# Altium PCB CAN Breakout.PcbDoc
Units mil, origin at the board's own origin, x right, y up, seen from the top; angles counter-clockwise.
Board outline 2952.76 x 2952.76 mil, 2 copper layers (Top Layer, Bottom Layer); 39 components, 20 nets, 94 pads, 38 vias.
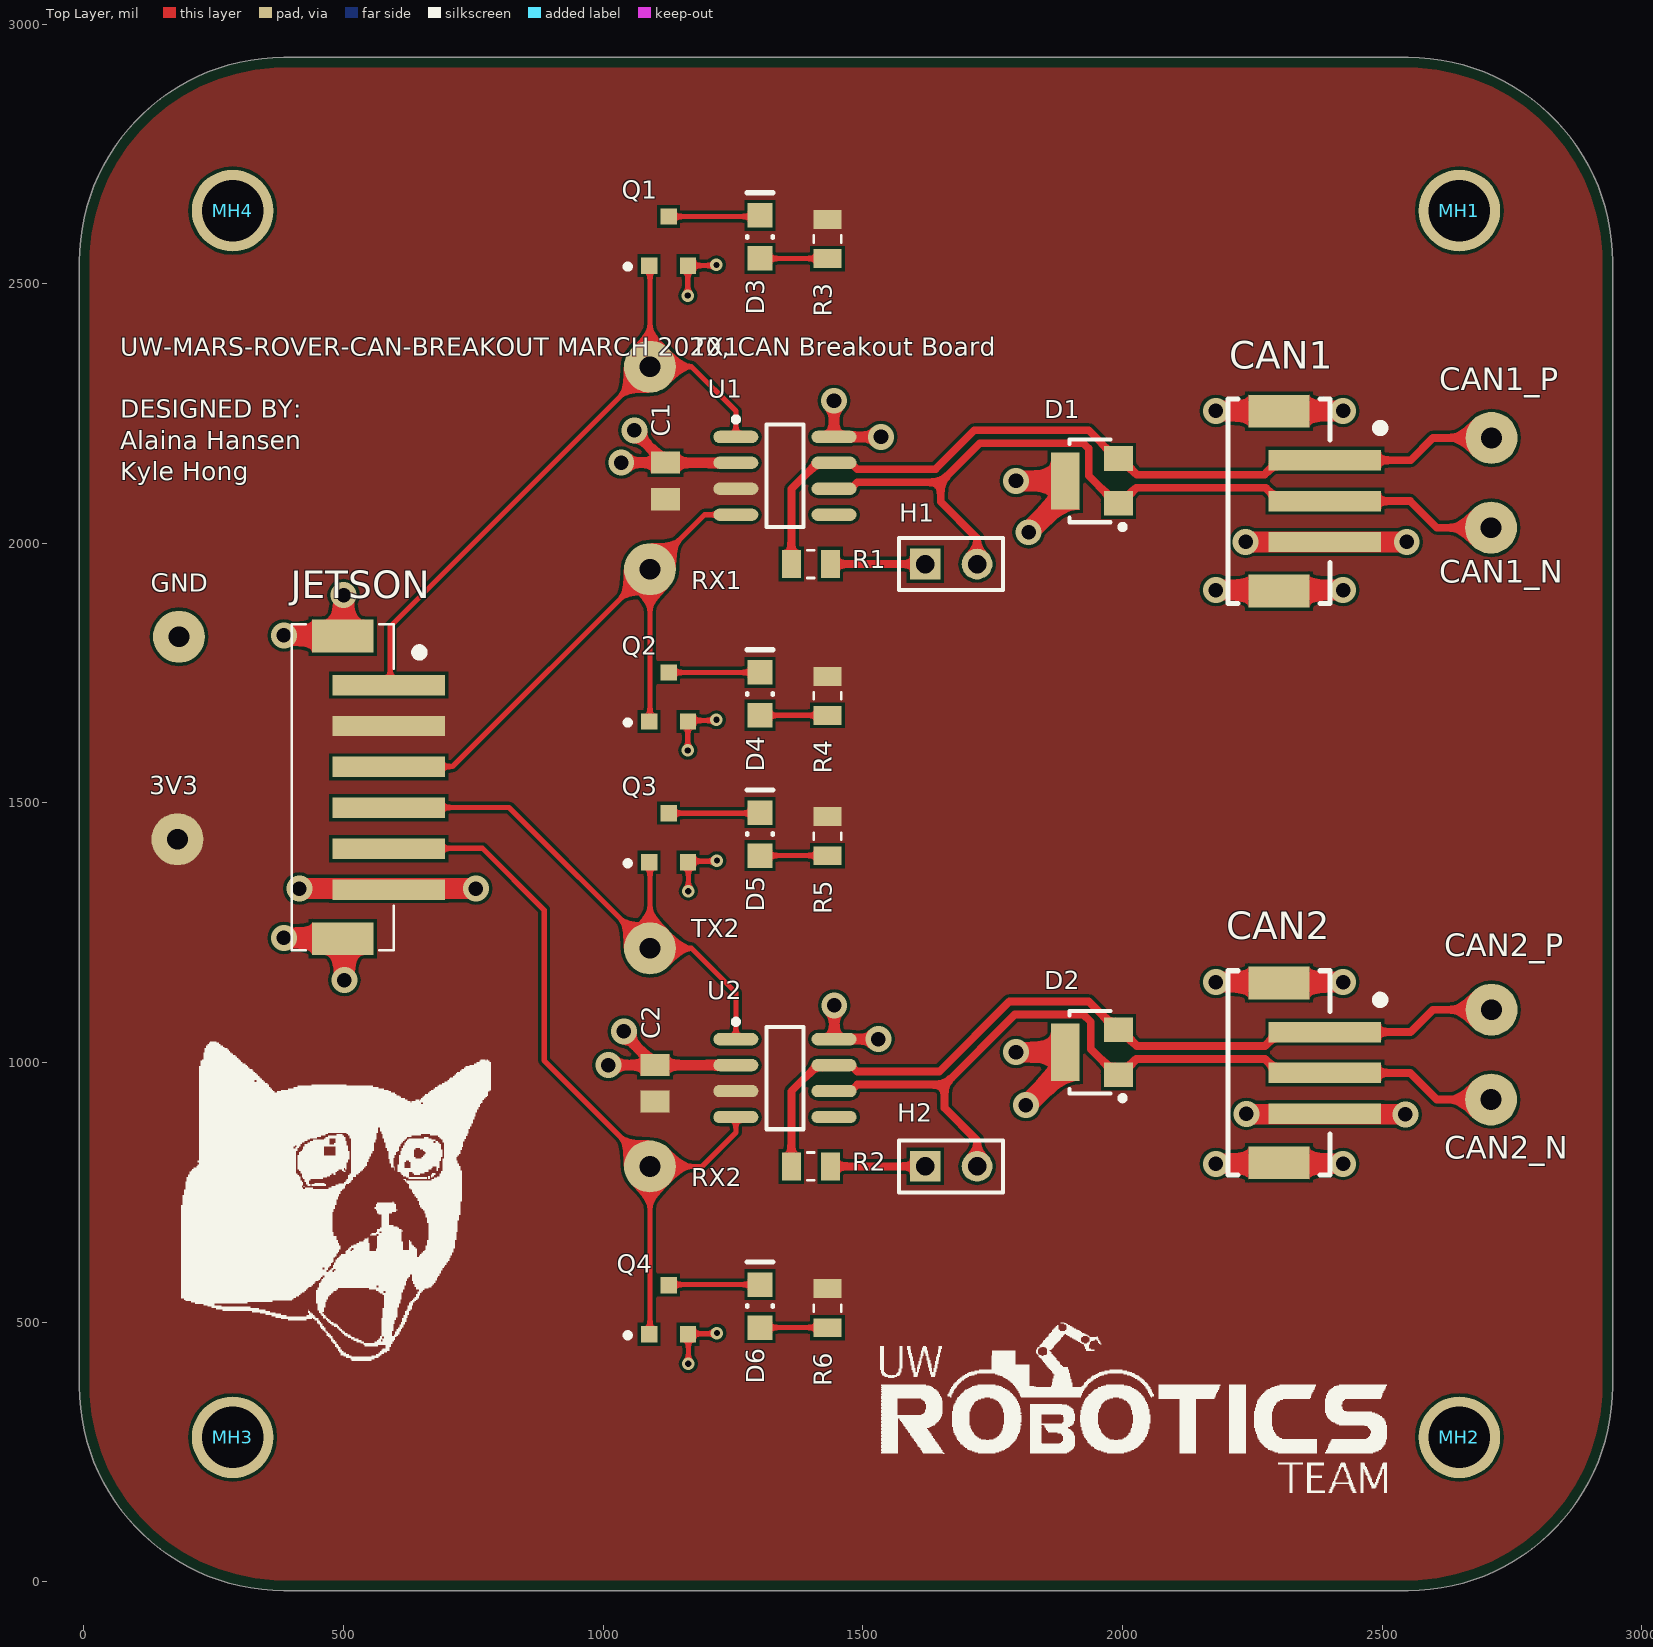
[diagram p0: Top Layer view]
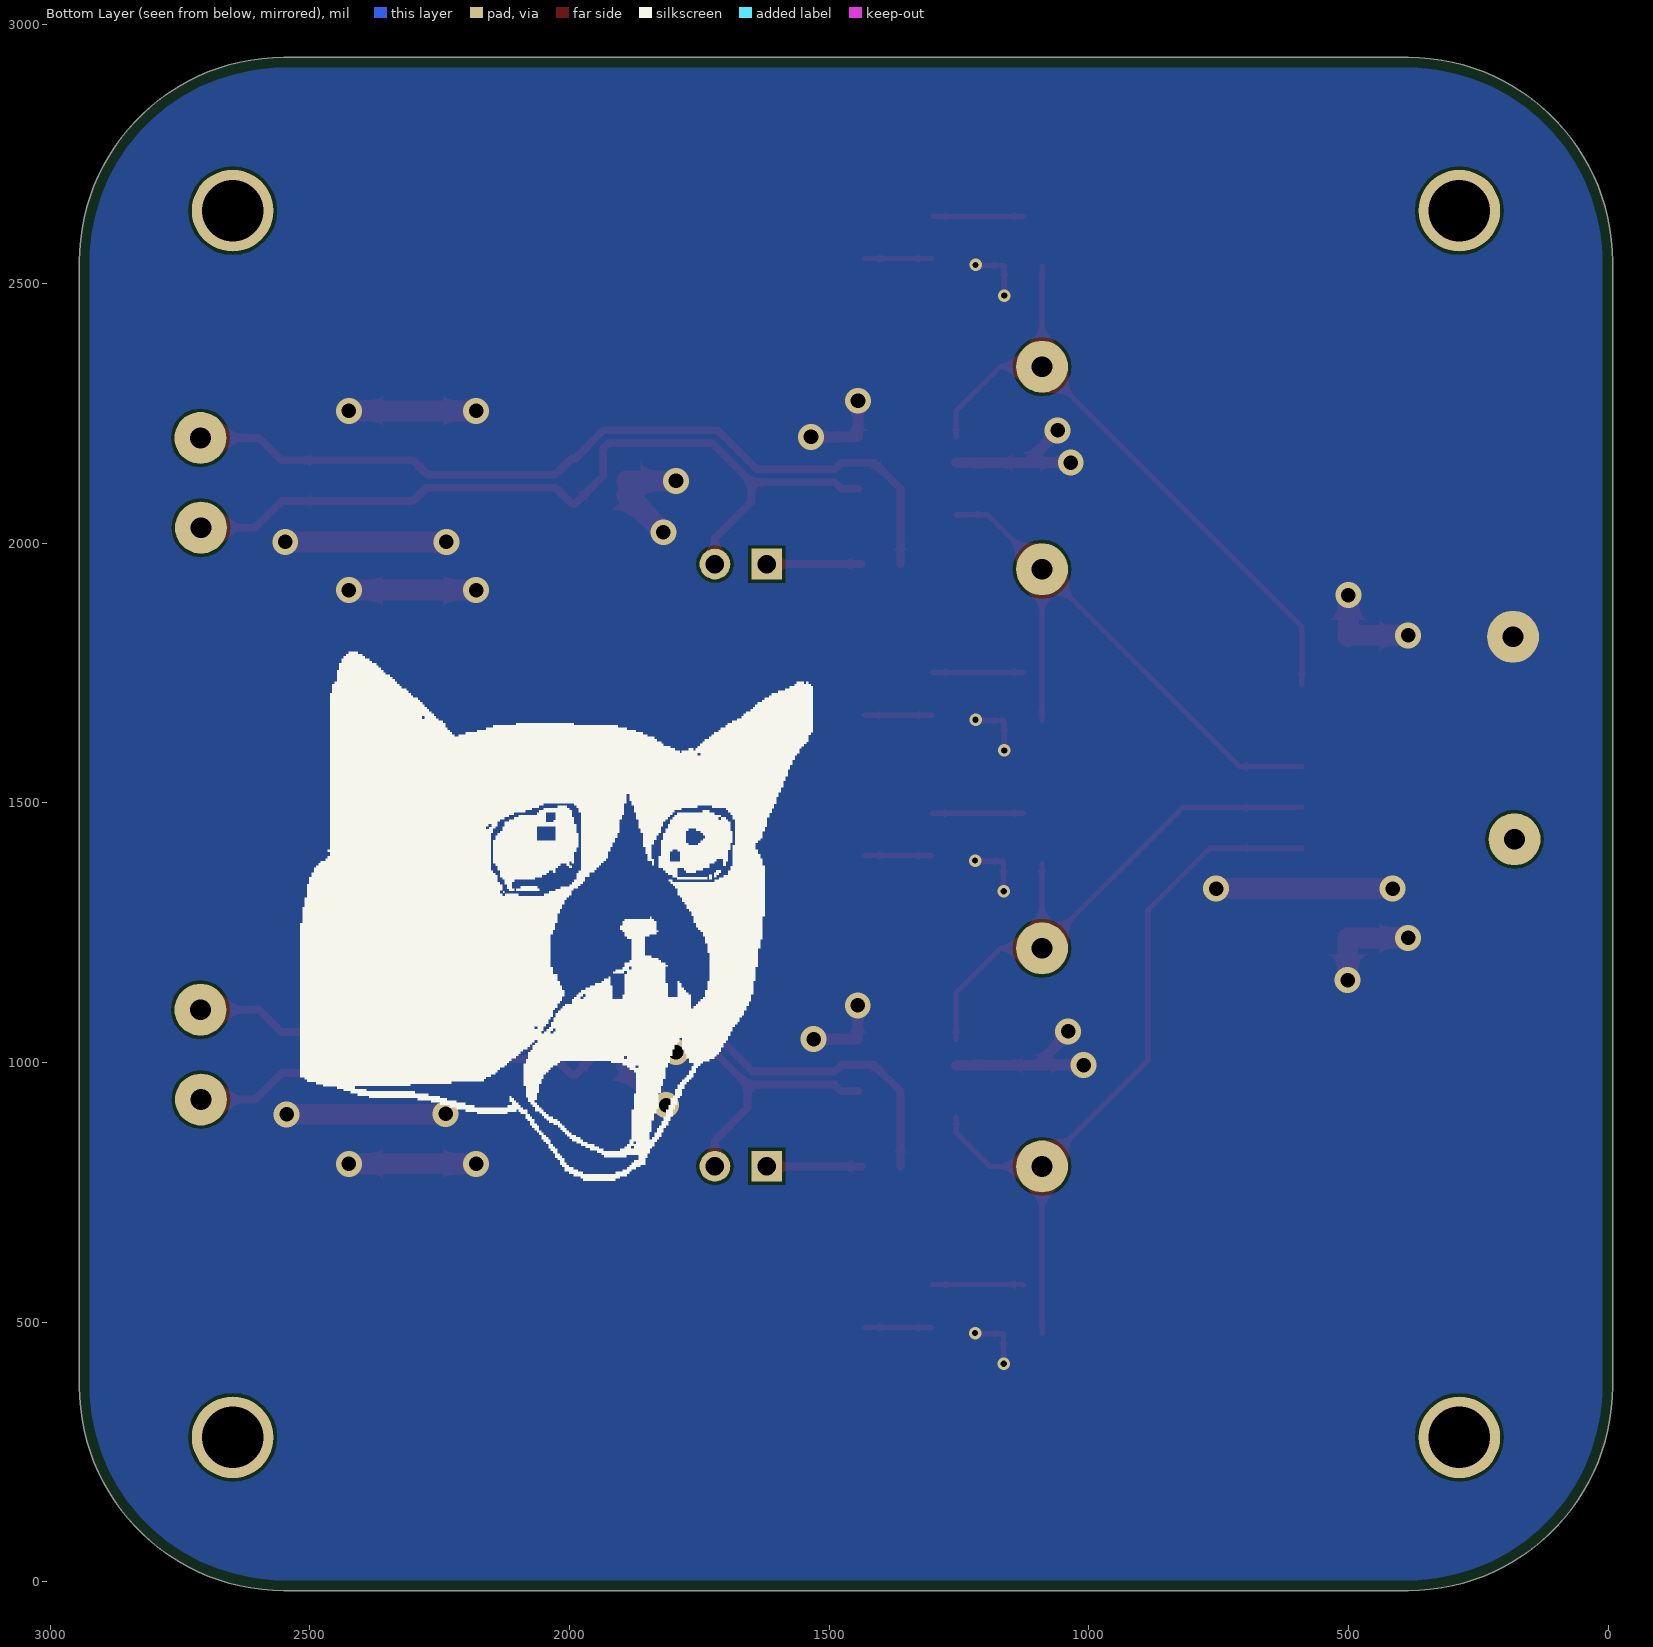
[diagram p1: Bottom Layer view, seen from below]
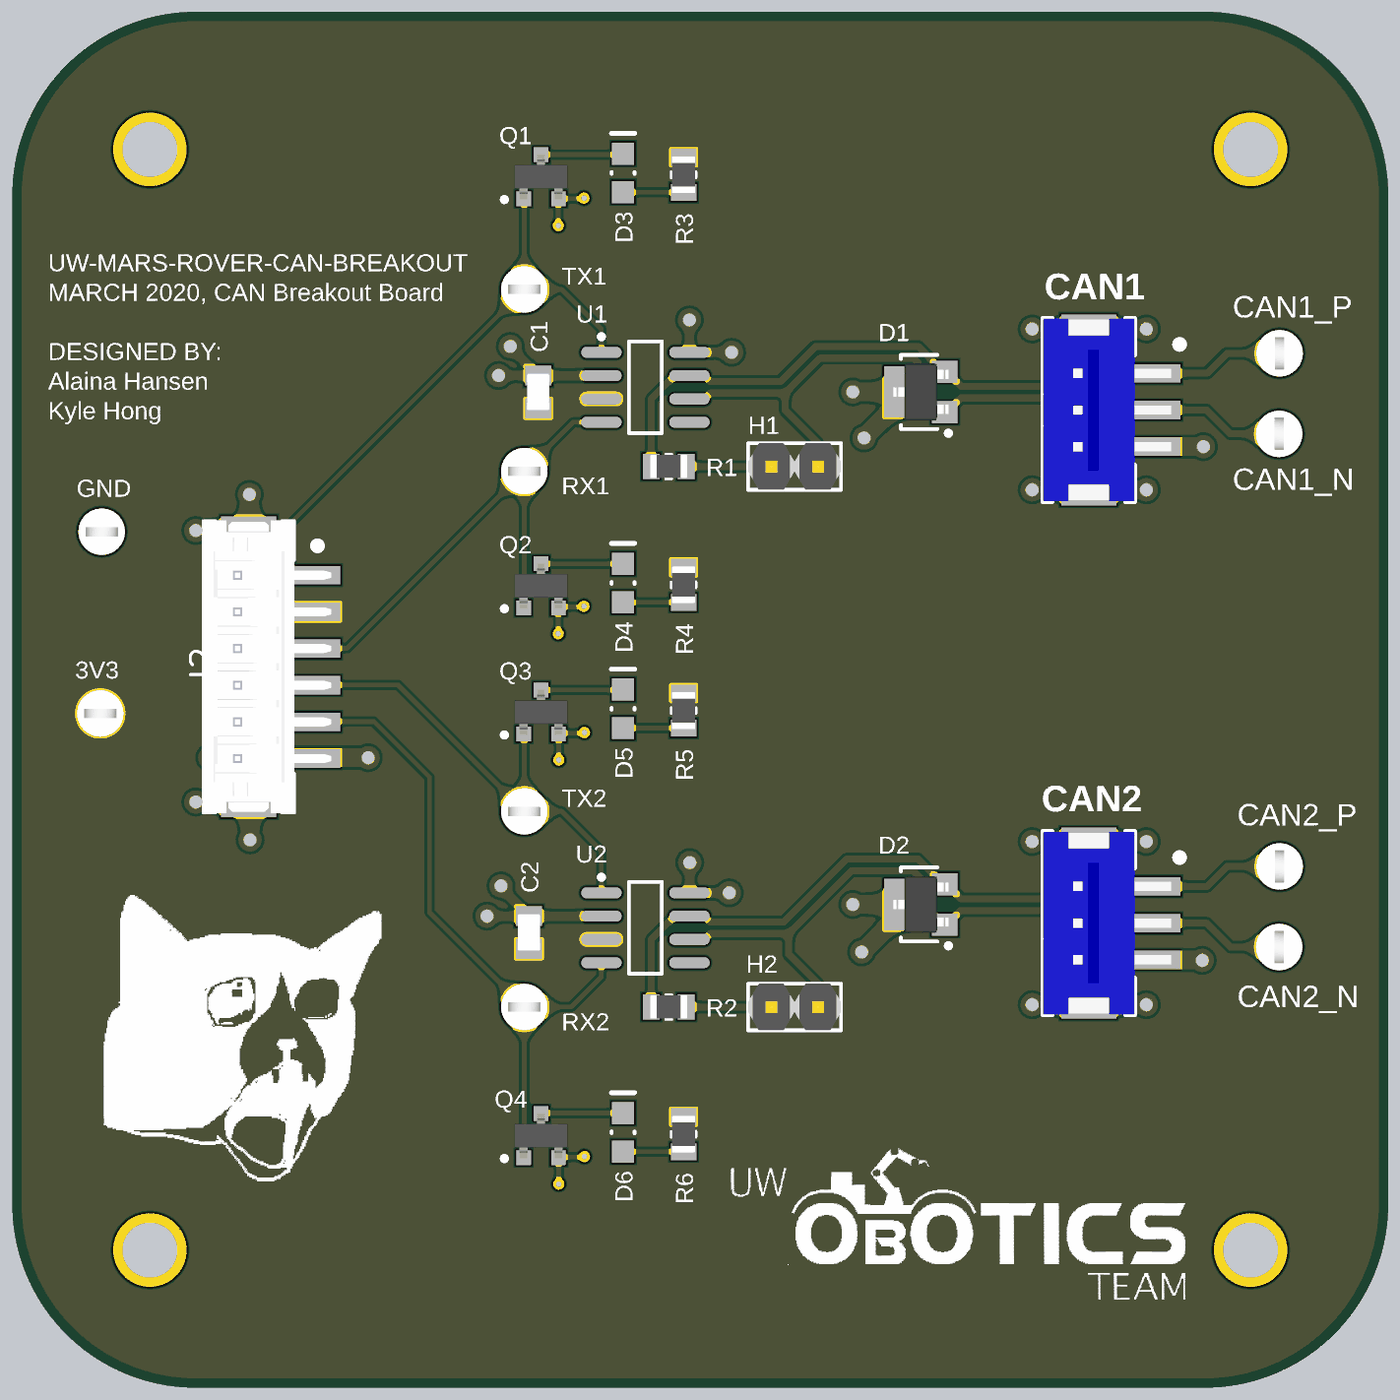
[diagram p2: 3D render of the assembled board from above, using the file's embedded part models]

## Layer stack, top to bottom
Top Solder: solder mask 0.4, Solder Resist, Dk 3.5
Top Layer: signal copper 1.4
Dielectric 1: dielectric 12.6, FR-4, Dk 4.8
Bottom Layer: signal copper 1.4
Bottom Solder: solder mask 0.4, Solder Resist, Dk 3.5

## Board outline
-8.77,376.72 -8.77,2542.07 cw(c384.93,2542.07) 384.93,2935.77 2550.28,2935.77 cw(c2550.28,2542.07) 2943.98,2542.07 2943.98,376.72 cw(c2550.28,376.72) 2550.28,-16.98 384.93,-16.98 cw(c384.93,376.72)

## Design rules (kind name [scope] priority, off if disabled: settings)
BoardOutlineClearance [All] p1: gap=20 ignorepadtopadclearanceinfootprint=FALSE
Clearance [All] p1: gap=6 ignorepadtopadclearanceinfootprint=TRUE
DiffPairsRouting [All] p1: maxlimit=10 minlimit=10 mostfreqgap=10 toplayer_minwidth=15 toplayer_maxwidth=15 toplayer_prefwidth=15 bottomlayer_minwidth=15 bottomlayer_maxwidth=15 bottomlayer_prefwidth=15 maxuncoupledlength=500
HoleSize [All] p1: absolutevalues=TRUE maxlimit=120 minlimit=1 maxpercent=80.000 minpercent=20.000
MinimumSolderMaskSliver [All] p1: minsoldermaskwidth=6
PolygonConnect PolygonConnect_1 [InComponent('VR1') and InNet('+3V3')] p1: connectstyle=Relief reliefconductorwidth=20 reliefentries=4 polygonreliefangle="90 Angle" airgapwidth=10
PolygonConnect [All] p2: connectstyle=Direct reliefconductorwidth=10 reliefentries=4 polygonreliefangle="90 Angle" airgapwidth=10
RoutingVias [All] p1: holewidth=12 width=24 viastyle="Through Hole" minholewidth=12 minwidth=24 maxholewidth=28 maxwidth=50
SilkToSolderMaskClearance [IsPad] p1: minsilkscreentomaskgap=6 clearancetoexposedcopper=TRUE
SolderMaskExpansion [All] p1: expansion=4
Width [All] p1: maxlimit=50 minlimit=6 preferedwidth=6 minimp=50.000000 maximp=50.000000 favimp=50.000000
26 further rules are at their usual default settings.

## Classes and differential pairs
differential pair CAN2: +CAN2_P -CAN2_N
differential pair CAN1: +CAN1_P -CAN1_N

## Components (designator, comment, footprint, x,y, rotation, side; value= is the part's Value field where it differs from the comment)
3V3 "TESTPOINT_LOOP" TESTPOINT_LOOP 180,1430 r0 top
C1 "CAP_0.1uF_50V_0805" CAPC2012X140N 1120,2120 r270 top value=0.1uF
C2 "CAP_0.1uF_50V_0805" CAPC2012X140N 1100,960 r270 top value=0.1uF
CAN1 "CON_3M_SM4" JST-B3B-SM4-TB 2202.99,2081.26 r270 top (schematic designator J1)
CAN1_N "TESTPOINT_LOOP" TESTPOINT_LOOP 2710,2030 r90 top
CAN1_P "TESTPOINT_LOOP" TESTPOINT_LOOP 2711,2203 r90 top
CAN2 "CON_3M_SM4" JST-B3B-SM4-TB 2202.99,980 r270 top (schematic designator J3)
CAN2_N "TESTPOINT_LOOP" TESTPOINT_LOOP 2710,928.74 r90 top
CAN2_P "TESTPOINT_LOOP" TESTPOINT_LOOP 2711,1101.74 r90 top
D1 "TVS_DIODE_CAN" TVS_DIODE_CAN 1941.18,2120 r180 top
D2 "TVS_DIODE_CAN" TVS_DIODE_CAN 1941.18,1020 r180 top
D3 "DIO_LED_G" LED_0805_LINE 1302,2590 r90 top
D4 "DIO_LED_R" LED_0805_LINE 1302,1710 r90 top
D5 "DIO_LED_G" LED_0805_LINE 1302,1440 r90 top
D6 "DIO_LED_R" LED_0805_LINE 1302,531 r90 top
GND "TESTPOINT_LOOP" TESTPOINT_LOOP 183,1820 r0 top
H1 "JUMPER_2" HDR1X2 1620,1960 r0 top
H2 "JUMPER_2" HDR1X2 1620,800 r0 top
JETSON "CON_6M_SM4" JST-B6B-SM4-TB 400,1530 r270 top (schematic designator J2)
MH1 "MOUNTING_HOLES" MOUNTING_HOLE 2648.71,2640.5 r0 top
MH2 "MOUNTING_HOLES" MOUNTING_HOLE 2648.71,278.29 r0 top
MH3 "MOUNTING_HOLES" MOUNTING_HOLE 286.5,278.29 r0 top
MH4 "MOUNTING_HOLES" MOUNTING_HOLE 286.5,2640.5 r0 top
Q1 "NMOS_20V_6A" NMOS_SOT23-3 1126,2582 r0 top
Q2 "NMOS_20V_6A" NMOS_SOT23-3 1126,1704 r0 top
Q3 "NMOS_20V_6A" NMOS_SOT23-3 1126,1433 r0 top
Q4 "NMOS_20V_6A" NMOS_SOT23-3 1126,524 r0 top
R1 "120" RESC2012X60N 1400,1960 r0 top
R2 "120" RESC2012X60N 1400,800 r0 top
R3 "120" RESC2012X60N 1432,2586 r90 top
R4 "120" RESC2012X60N 1432,1706 r90 top
R5 "120" RESC2012X60N 1432,1436 r90 top
R6 "120" RESC2012X60N 1432,527 r90 top
RX1 "TESTPOINT_LOOP" TESTPOINT_LOOP 1090,1950 r0 top
RX2 "TESTPOINT_LOOP" TESTPOINT_LOOP 1090,800 r0 top
TX1 "TESTPOINT_LOOP" TESTPOINT_LOOP 1090,2340 r0 top
TX2 "TESTPOINT_LOOP" TESTPOINT_LOOP 1090,1220 r0 top
U1 "IC TXRX CAN" LT-S8_N 1350,2130 r0 top
U2 "IC TXRX CAN" LT-S8_N 1350,970 r0 top

## Footprints (in the part's own frame and the unit in brackets; to place one, negate y for a bottom-side part, rotate by r counter-clockwise, add the part's x,y. Pads: shape width x height; smd on the part's side, far side on the other; paste and mask are expansions set on the pad)
CAPC2012X140N [mm]
  rect 1.08x1.42 smd: 1(-0.895,0) 2(0.895,0)
  body extent -1,-0.62 1,0.62, height 1.4
HDR1X2 [mm] "Connector; Header; 2 Position"
  rect 1.5x1.5 hole 0.9: 1(0,0)
  round 1.5 hole 0.9: 2(2.54,0)
  silkscreen extent -1.27,-1.27 3.81,1.27, body extent -1.27,-1.27 3.81,1.27, height 6.35
JST-B3B-SM4-TB [mm]
  rect 1.6x3 smd: 0(-4.4,2.5) 0(4.4,2.5)
  rect 1x5.5 smd: 1(-2,4.75) 2(0,4.75) 3(2,4.75)
  silkscreen extent -5,0 5,7.65, body extent -4.97,0 4.97,7, height 6.6
JST-B6B-SM4-TB [mm]
  rect 1.6x3 smd: 0(-7.4,2.5) 0(7.4,2.5)
  rect 1x5.5 smd: 1(-5,4.75) 2(-3,4.75) 3(-1,4.75) 4(1,4.75) 5(3,4.75) 6(5,4.75)
  silkscreen extent -7.98,0 7.98,6.45, body extent -7.98,0 7.98,7, height 6.7
LED_0805_LINE [mm] "SMD, 2-Leads, Body 2x1.25mm"
  rect 1.2x1.2 smd: 1(-1.05,0) 2(1.05,0)
  silkscreen extent -0.05,-0.63 2.16,0.64, body extent -1,-0.63 1,0.63, height 0.8
LT-S8_N [mm] "SOP, 8-Leads, Body 4.9x3.9mm, Pitch 1.27mm, IPC Medium Density"
  oval 2.2x0.6 smd: 1(-2.4,1.905) 2(-2.4,0.635) 3(-2.4,-0.635) 4(-2.4,-1.905) 5(2.4,-1.905) 6(2.4,-0.635) 7(2.4,0.635) 8(2.4,1.905)
  silkscreen extent -2.52,-2.5 0.9,2.88, body extent -2,-2.5 2,2.5, height 1.76
MOUNTING_HOLE [mm]
  round 4 hole 3 unplated: 0(0,0)
NMOS_SOT23-3 [mm] "SOT23, 3 pins, Body 2.90mm x 2.80mm"
  rect 0.8x0.8 smd: 1(-0.95,-1.2) 2(0.95,-1.2) 3(0,1.2)
  silkscreen extent -2.12,-1.37 -1.88,-1.13, body extent -1.46,-1.25 1.46,1.23, height 1
RESC2012X60N [mm]
  rect 0.92x1.38 smd: 1(-0.955,0) 2(0.955,0)
  silkscreen extent -0.17,-0.68 0.17,0.68, body extent -1,-0.62 1,0.62, height 0.6
TESTPOINT_LOOP [mm]
  round 2.54 hole 1.02: 1(0,0)
  body extent -1.27,-1.27 1.27,1.27, height 4.57
TVS_DIODE_CAN [mm] "SOT23, 3-Leads, Body 2.95x2.80mm, Pitch 0.95mm, IPC Low Density"
  rect 1.4x1.2 smd: 1(-1.3,1.1) 2(-1.3,-1.1)
  rect 1.4x2.8 smd: 3(1.3,0)
  silkscreen extent -1.63,-2.02 1.09,2.37, body extent -1.5,-1.55 1.5,1.55, height 1.25

## Part data
3V3 CAN1_N CAN1_P CAN2_N CAN2_P GND RX1 RX2 TX1 TX2: "Loop testpoint through-hole pad", Manufacturer 1="Keystone Electronics", Manufacturer Part Number 1=5002, Supplier Part Number 1=36-5002-ND, Mount="Through Hole", Supplier 1=Digi-Key
C1 C2: "CAP CER 0.1UF 50V X7R 0805", Capacitance=100nF, Case/Package=0805, Case Code (Metric)=2012, Dielectric=X7R, Manufacturer 1=Murata, Manufacturer Part Number 1=GCD21BR71H104KA01L, Max Operating Temperature=125∑C, Min Operating Temperature=-55∑C, Ratings=AEC-Q200, Supplier Part Number 1=490-11955-1-ND, Tolerance=10%, Voltage Rating=50V, Case Code (Imperial)=0805, ComponentLink1Description=https://datasheet.ciiva.com/29537/c03e-29537701.pdf?src-supplier=Digi-Key, ComponentLink1URL=https://datasheet.ciiva.com/29537/c03e-29537701.pdf?src-supplier=Digi-Key, Depth=1.25mm, Height=1.25mm, Length=2mm, Mount="Surface Mount", Supplier 1=Digi-Key, Termination=SMD/SMT, Thickness=0.049inch, Width=0.049inch
CAN1 CAN2: "CONN HEADER SMD 3POS 2MM", Manufacturer 1=JST, Manufacturer Part Number 1=B3B-PH-SM4-TB(LF)(SN), Max Current Rating=2A, Max Voltage Rating=100V, Supplier Part Number 1=455-1735-1-ND, ComponentLink1Description=https://datasheet.ciiva.com/11747/0900766b80ddea81-11747684.pdf?src-supplier=RSComponents, ComponentLink1URL=https://datasheet.ciiva.com/11747/0900766b80ddea81-11747684.pdf?src-supplier=RSComponents, Mount="Surface Mount", Pitch=2mm, Supplier 1=Digi-Key
D1 D2: "TVS DIODE 24V 41V SOT323-3", Manufacturer 1="Nexperia USA Inc.", Manufacturer Part Number 1=PESD2CAN,215, Package="SC-70, SOT-323", Supplier Part Number 1=1727-3891-1-ND, ComponentLink1Description=Datasheet, ComponentLink1URL=https://assets.nexperia.com/documents/data-sheet/PESD1CAN-U.pdf, Mount="Surface Mount", Supplier 1=Digi-Key
D3 D5: "LED GREEN DIFFUSED 0805 SMD", Forward Voltage Drop=2.2V, Manufacturer 1=OSRAM, Manufacturer Part Number 1="LG R971-KN-1", Package="0805 (2012 Metric)", Supplier Part Number 1=475-1410-1-ND, Mount="Surface Mount", Supplier 1=Digi-Key
D4 D6: "LED RED DIFFUSED 0805 SMD", Forward Voltage Drop=2V, Manufacturer 1=OSRAM, Manufacturer Part Number 1="LS R976-NR-1", Package="0805 (2012 Metric)", Supplier Part Number 1=475-1278-1-ND, Mount="Surface Mount", Supplier 1=Digi-Key
H1 H2: "HEADER 2X1", Manufacturer 1="TE Connectivity", Manufacturer Part Number 1=87220-2, Supplier Part Number 1=A26542-ND, Mount="Through Hole", Supplier 1=Digi-Key
JETSON: "CONN HEADER SMD 6POS 2MM", Current Rating=2A, Manufacturer=JST, Manufacturer Part Number=B6B-PH-SM4-TB(LF)(SN), Supplier Part Number 1=455-1738-1-ND, Voltage Rating=100V, Mount="Surface Mount", Supplier 1=DigiKey
MH1 MH2 MH3 MH4: "6cm x 6cm"
Q1 Q2 Q3 Q4: "MOSFET N-CH 20V 6A SOT23", Manufacturer 1="Alpha & Omega", Manufacturer Part Number 1=AO3420, Package="TO-236-3, SC-59, SOT-23-3", Supplier Part Number 1=785-1014-1-ND, ComponentLink1Description=Datasheet, ComponentLink1URL=http://aosmd.com/res/data_sheets/AO3420.pdf, Mount="Surface Mount", Supplier 1=Digi-Key
R1 R2 R3 R4 R5 R6: library part RES_120R_0805, "RES SMD 120 OHM 1% 1/8W 0805", Case Code (Imperial)=0805, Case Code (Metric)=2012, Manufacturer 1=Vishay, Manufacturer Part Number 1=CRCW0805120RFKEA, Power Rating=125mW, Supplier Part Number 1=541-120CCT-ND, Voltage Rating=150V, ComponentLink1Description=https://datasheet.ciiva.com/11810/0900766b80d98b26-11810477.pdf?src-supplier=RSComponents, ComponentLink1URL=https://datasheet.ciiva.com/11810/0900766b80d98b26-11810477.pdf?src-supplier=RSComponents, ComponentLink2Description=https://datasheet.ciiva.com/3258/dcrcwe3-3258069.pdf?src-supplier=Avnet, ComponentLink2URL=https://datasheet.ciiva.com/3258/dcrcwe3-3258069.pdf?src-supplier=Avnet, ComponentLink3Description=https://datasheet.ciiva.com/26317/fld-crcw-e3-data-en-26317334.pdf?src-supplier=Distrelec, ComponentLink3URL=https://datasheet.ciiva.com/26317/fld-crcw-e3-data-en-26317334.pdf?src-supplier=Distrelec, ComponentLink4Description=https://datasheet.ciiva.com/2467/dcrcwe3-2467512.pdf?src-supplier=Digi-Key, ComponentLink4URL=https://datasheet.ciiva.com/2467/dcrcwe3-2467512.pdf?src-supplier=Digi-Key, ComponentLink5Description=https://datasheet.ciiva.com/2467/dcrcwe3-2467514.pdf?src-supplier=Digi-Key, ComponentLink5URL=https://datasheet.ciiva.com/2467/dcrcwe3-2467514.pdf?src-supplier=Digi-Key, ComponentLink6Description=https://datasheet.ciiva.com/16211/dcrcwe3-16211931.pdf?src-supplier=Future+Electronics, ComponentLink6URL=https://datasheet.ciiva.com/16211/dcrcwe3-16211931.pdf?src-supplier=Future+Electronics, ComponentLink7Description=https://datasheet.ciiva.com/2467/dcrcwe3-2467513.pdf?src-supplier=Digi-Key, ComponentLink7URL=https://datasheet.ciiva.com/2467/dcrcwe3-2467513.pdf?src-supplier=Digi-Key, ComponentLink8Description=https://datasheet.ciiva.com/16852/dcrcwe3-16852841.pdf?src-supplier=Avnet+Europe, ComponentLink8URL=https://datasheet.ciiva.com/16852/dcrcwe3-16852841.pdf?src-supplier=Avnet+Europe, ComponentLink9Description=https://datasheet.ciiva.com/7777/1697337-7777354.pdf?src-supplier=Element14, ComponentLink9URL=https://datasheet.ciiva.com/7777/1697337-7777354.pdf?src-supplier=Element14, ComponentLink10Description=https://datasheet.ciiva.com/16788/70201119-16788154.pdf?src-supplier=Allied+Electronics, ComponentLink10URL=https://datasheet.ciiva.com/16788/70201119-16788154.pdf?src-supplier=Allied+Electronics, ComponentLink11Description=https://datasheet.ciiva.com/7777/1720486-7777567.pdf?src-supplier=Element14, ComponentLink11URL=https://datasheet.ciiva.com/7777/1720486-7777567.pdf?src-supplier=Element14, Mount="Surface Mount", Resistance=120, Supplier 1=Digi-Key
U1 U2: library part LTC2875, "IC TXRX CAN 4MBPS 8SO", Manufacturer 1="Linear Technologies", Manufacturer Part Number 1=LTC2875IS8#PBF, Package="8-SOIC (0.154\", 3.90mm Width)", Supplier Part Number 1=LTC2875IS8#PBF-ND, ComponentLink1Description=Datasheet, ComponentLink1URL=https://www.analog.com/media/en/technical-documentation/data-sheets/2875f.pdf, Mount="Surface Mount", Supplier 1=Digi-Key

## Via types
v1: diameter 50, hole 28, Top Layer to Bottom Layer, tented both sides, 30 vias
v2: diameter 24, hole 12, Top Layer to Bottom Layer, 8 vias

## Nets (pads, with @x,y where several pads share a name; then routed paths per layer and width w, separated by ;. In a path a pad name is that pad's centre, name@x,y a point inside that pad or via, vN(x,y) a via of type N, cw(c..) or ccw(c..) an arc to the next point about the centre after c; other vN are vias at no path point)
+3V3: 3V3.1 C1.2 C2.2 JETSON.2 R3.2 R4.2 R5.2 R6.2 U1.3 U2.3
CAN1_N: CAN1.2 CAN1_N.1 D1.1 H1.2 U1.6 | length 1607.4
  Top Layer w15: U1.6 1476.58,2105 1489.08,2117.5 1650.12,2117.5 ; H1.2 1720,2010 1650.12,2079.88 1650.12,2117.5 ; D1.1 1988.43,2076.69 1972.3,2092.82 1935.06,2130.06 1935.06,2182.37 1924.81,2192.62 1725.24,2192.62 1650.12,2117.5 ; D1.1@1996.3,2076.69 2026.61,2107 2275.68,2107 2301.41,2081.26 CAN1.2 2554.16,2081.26 2605.42,2030 CAN1_N.1
CAN1_P: CAN1.1 CAN1_P.1 D1.2 R1.1 U1.7 | length 1615.7
  Top Layer w15: R1.1 1362.4,2104.41 1412.99,2155 U1.7 1476.58,2155 1489.08,2142.5 1639.77,2142.5 1714.88,2217.62 1935.16,2217.62 1960.06,2192.72 1960.06,2191.91 1972.3,2179.67 1972.3,2179.43 1988.43,2163.31 D1.2 1996.3,2163.31 2027.61,2132 2273.41,2132 2301.41,2160 CAN1.1 2555,2160 2598,2203 CAN1_P.1
CAN1_RX: JETSON.3 Q2.1 RX1.1 U1.4 | length 1160.2
  Top Layer w6: Q2.1 Q2.1@1090,1658.16
  Top Layer w10: JETSON.3@590,1570 710,1570 RX1.1 ; Q2.1@1090,1658.16 RX1.1 ; U1.4 1195,2055 RX1.1
CAN1_TX: JETSON.1 Q1.1 TX1.1 U1.1 | length 1267.5
  Top Layer w6: Q1.1 Q1.1@1090,2533.35
  Top Layer w10: JETSON.1@590,1727.48 590,1840 TX1.1 ; Q1.1@1090,2533.35 TX1.1 ; U1.1@1254,2206.51 U1.1 1255.51,2254.49 1170,2340 TX1.1
CAN2_N: CAN2.2 CAN2_N.1 D2.1 H2.2 U2.6 | length 1633.7
  Top Layer w15: U2.6 1476.58,945 1489.08,957.5 1657.5,957.5 ; H2.2 1720,850 1657.5,912.5 1657.5,957.5 ; CAN2_N.1 2605.42,928.74 2554.16,980 CAN2.2 2301.41,980 2274.41,1007 2026.61,1007 1996.3,976.69 D2.1 1988.43,976.69 1939.15,1025.97 1939.15,1078.28 1924.81,1092.62 1792.62,1092.62 1657.5,957.5
CAN2_P: CAN2.1 CAN2_P.1 D2.2 R2.1 U2.7 | length 1640.1
  Top Layer w15: R2.1 1362.4,944.41 1412.99,995 U2.7 1476.58,995 1489.08,982.5 1647.14,982.5 1782.26,1117.62 1935.16,1117.62 1972.3,1080.48 1972.3,1079.43 1988.43,1063.31 D2.2 1996.3,1063.31 2027.61,1032 2274.68,1032 2301.41,1058.74 CAN2.1 2555,1058.74 2598,1101.74 CAN2_P.1
CAN2_RX: JETSON.5 Q4.1 RX2.1 U2.4 | length 1470.2
  Top Layer w6: Q4.1 Q4.1@1090,478.16
  Top Layer w10: JETSON.5@590,1412.52 767.48,1412.52 886.3,1293.7 886.3,1003.7 RX2.1 ; Q4.1@1090,478.16 RX2.1 ; U2.4@1256,894.51 U2.4 1255.51,865.51 1190,800 RX2.1
CAN2_TX: JETSON.4 Q3.1 TX2.1 U2.1 | length 1069.1
  Top Layer w6: Q3.1 Q3.1@1090,1384.35
  Top Layer w10: JETSON.4@590,1491.26 818.74,1491.26 TX2.1 ; Q3.1@1090,1384.35 TX2.1 ; U2.1 1255.51,1134.49 1170,1220 TX2.1
GND: C1.1 C2.1 CAN1.0 CAN1.3 CAN2.0 CAN2.3 D1.3 D2.3 GND.1 JETSON.0 JETSON.6 Q1.2 Q2.2 Q3.2 Q4.2 U1.2 U1.8 U2.2 U2.8 | length 4196.2
  Top Layer w6: Q1.2@1162,2533.35 Q1.2 ; v2@1216.76,2534.76 v2(1218,2536) ; v1(2238.74,901.26) v1@2239.37,900.63 ; v1@2544.37,900.63 v1(2545,900)
  Top Layer w10: Q1.2@1162,2533.35 1163,2532.35 v2(1163,2477) ; v2(1163,1601) Q2.2@1163,1656.35 ; Q2.2@1163.4,1658.76 v2@1216.76,1658.76 ; Q1.2 v2@1216.76,2534.76 ; v2(1164,420) Q4.2@1164,475.35 ; v2(1164,1330) Q3.2@1164,1385.35 ; Q4.2@1164.4,477.76 v2@1217.76,477.76 ; Q3.2@1164.4,1387.76 v2@1217.76,1387.76 ; U2.8 U2.8@1445,1045.51 ; v1@1445,1100.02 v1(1445,1110) ; v1@1805.08,918.08 v1(1814.09,918.08) ; D2.3@1890,992.44 D2.3 ; D1.3@1890,2092.44 D1.3
  Top Layer w20: v1(1010,995) U2.2 ; v1(1034.76,2155.24) C1.1 ; v1(1040,1060) 1040,1055.24 C2.1 ; v1(1060,2217.62) 1060,2215.24 C1.1 ; U1.2 1120.24,2155 C1.1 ; U2.8 v1(1530,1045) ; v1(1444.49,2274.49) U1.8 v1(1535,2205) ; U2.8@1445,1045.51 v1@1445,1100.02
  Top Layer w40: GND.1@176,1813 GND.1 ; v1(385,1240) 500.71,1240 501.42,1239.29 v1(501.42,1158.58) ; v1(385,1822.68) JETSON.0@500.71,1822.68 ; v1(415,1335) v1(755,1335) ; v1(500,1900) 500,1821.42 JETSON.0@501.42,1820 ; v1(1795,1020) D2.3 ; v1(1795,2120) D1.3 ; v1(1814.09,918.08) 1815.64,918.08 D2.3@1890,992.44 ; v1@1819.22,2021.66 D1.3@1890,2092.44 ; v1(2180,805) v1(2425,805) ; v1(2180,1155) v1(2425,1155) ; v1(2180,1910) v1(2425,1910) ; v1(2180,2255) 2180.26,2254.74 2301.16,2254.74 2301.42,2254.49 2301.93,2255 v1(2425,2255) ; v1(2237.16,2002.84) 2237.32,2002.68 2389.84,2002.68 CAN1.3 v1(2547.52,2002.52) ; v1@2239.37,900.63 v1@2544.37,900.63
  other v1: 1819.22,2021.22
  other v2: 1219,479 1219,1389 1218,1660
NetD3_1: D3.1 R3.1 | length 130.1
  Top Layer w6: D3.1 D3.1@1302.26,2548.4
  Top Layer w10: D3.1@1302.26,2548.4 R3.1
NetD3_2: D3.2 Q1.3 | length 176.9
  Top Layer w6: D3.2@1299.91,2629.24 D3.2
  Top Layer w10: Q1.3 D3.2@1299.91,2629.24
NetD4_1: D4.1 R4.1 | length 130.1
  Top Layer w6: R4.1@1431.74,1668.66 R4.1
  Top Layer w10: D4.1 R4.1@1431.74,1668.66
NetD4_2: D4.2 Q2.3 | length 176
  Top Layer w6: D4.2@1301.91,1751.24 D4.2
  Top Layer w10: Q2.3 D4.2@1301.91,1751.24
NetD5_1: D5.1 R5.1 | length 130.1
  Top Layer w6: R5.1@1431.74,1398.66 R5.1
  Top Layer w10: D5.1 R5.1@1431.74,1398.66
NetD5_2: D5.2 Q3.3 | length 176.5
  Top Layer w6: D5.2@1300.91,1480.24 D5.2
  Top Layer w10: Q3.3 D5.2@1300.91,1480.24
NetD6_1: D6.1 R6.1 | length 130.1
  Top Layer w6: R6.1@1431.74,489.66 R6.1
  Top Layer w10: D6.1 R6.1@1431.74,489.66
NetD6_2: D6.2 Q4.3 | length 176.6
  Top Layer w10: Q4.3@1126,571 1127.34,572.34 D6.2
NetH1_1: H1.1 R1.2 | length 185.8
  Top Layer w6: R1.2 R1.2@1440,1962.4
  Top Layer w15: R1.2 H1.1
NetH2_1: H2.1 R2.2 | length 182.4
  Top Layer w15: R2.2 H2.1
pads on no net: MH1.0 MH2.0 MH3.0 MH4.0 U1.5 U2.5

## Polygon pours and split planes (outlines as drawn)
+3V3 on Top Layer "+3V3_L01_P000" (solid, pour order 0): -221,3041 -48,3041 3068,3041 3068,1757 3068,-344 -221,-344
no net on Top Layer "NONET_L01_P001" (solid, pour order 1): -504,-61
no net on Bottom Layer "NONET_L02_P003" (solid, pour order 3): -145,3307
GND on Bottom Layer "GND_L02_P002" (solid, pour order 2): -77,3204 -98,3225 3086,3225 3238,3073 3194,3029 3194,-500 -109,-500 -285,-324

## Silkscreen, mask and mechanical layers (free items; w line width, h text height)
Top Overlay:
  drawing of 22 lines, arcs and shapes, not listed
  text "UW-MARS-ROVER-CAN-BREAKOUT MARCH 2020, CAN Breakout Board /  / DESIGNED BY: / Alaina Hansen / Kyle Hong" at 70,2110 h60
Bottom Overlay:
  drawing of 6 lines, arcs and shapes, not listed
Mechanical 1:
  circle w0.5: c286.5,278.29 r59.06
  circle w0.5: c2648.71,2640.5 r59.06
  circle w0.5: c286.5,2640.5 r59.06
  circle w0.5: c2648.71,278.29 r59.06
  lines w0.5: -8.77,376.72 ccw(c384.93,376.72) 384.93,-16.98 2550.28,-16.98 ccw(c2550.28,376.72) 2943.98,376.72 2943.98,2542.07 ccw(c2550.28,2542.07) 2550.28,2935.77 384.93,2935.77 ccw(c384.93,2542.07) -8.77,2542.07 -8.77,376.72